# Altium PCB PCB2.PcbDoc (part 2 of 2)
Units mil, origin at the board's own origin, x right, y up, seen from the top; angles counter-clockwise.
Board outline 322 x 552 mil, 6 copper layers (Top Layer, Layer 2, Layer 3, Layer 4, Layer 5, Bottom Layer), stack 16.56 mil thick; 59 components, 50 nets, 249 pads, 145 vias.
Unrouted connection lines stored in the file: 1.
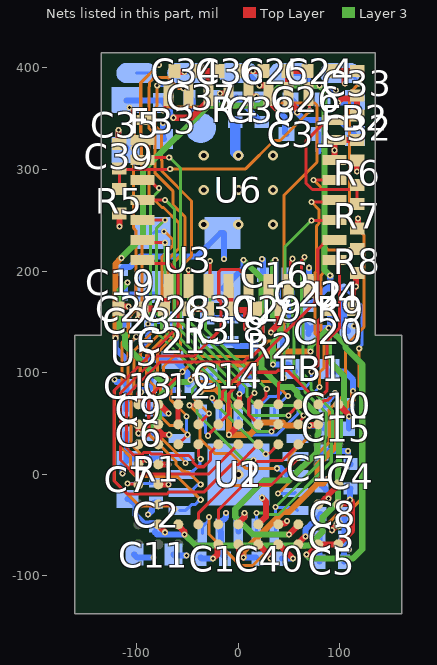
[diagram p6: the nets of this part, all layers, seen from the top]

## Part data
C1 C2 C3 C4 C5 C6 C9 C10 C12 C13 C16 C18 C24 C28 C30 C32 C36 C37 C40: library part CMP-cc290632c88a13ee-3, "0.1 µF ±10% 16V Ceramic Capacitor X7S 0201 (0603 Metric)", Capacitance="100 nF", Capacitance Tolerance=±10%, Case/Package=0201, Dielectric Characteristic=X7S, Voltage Rating (DC)="16.0 V", Lead-Free Status="Lead Free", Manufacturer Part Number=GRM033C71C104KE14D, Mounting Style="Surface Mount", OctopartID=cc290632c88a13ee, Octopart Url=http://octopart.com/grm033c71c104ke14d-murata-51454405, Packaging=Reel, RoHS=Compliant, Size-Length="600 µm", Size-Thickness="300 µm", Size-Width="300 µm"
C7 C11 C14 C20 C21: library part CMP-eacb22ede71a350c-8, "10 µF ±20% 10V Ceramic Capacitor X5R 0402 (1005 Metric)", Capacitance=10uF
C8 C15 C19 C25 C27 C29 C33 C34: library part CMP-19299660-4, "10000 pF ±10% 10V Ceramic Capacitor X7R 0201 (0603 Metric)", Capacitance=0.01uF, Case/Package=0201
C17 C26 C31: library part CMP-b7737c8c1b6d68b4-6, "4.7 µF Molded Tantalum Capacitors 10 V 0402 (1005 Metric) -", Capacitance=4.7µF, Voltage - Rated=10V, OctopartID=b7737c8c1b6d68b4, Octopart Url=http://octopart.com/f981a475mualzt-avx-49645944, Packaging="Tape & Reel (TR)"
C22 C23 C39: library part CMP-7dcab586fd61a20d-5, "1 µF ±20% 6.3V Ceramic Capacitor X5R 0201 (0603 Metric)", Capacitance="1.00 µF", Case/Package (SI)=0603, Dielectric Characteristic=X5R, OctopartID=7dcab586fd61a20d, Size-Length="600 µm"
C35: library part CMP-ed552659f9643292-2, "22 µF Molded Tantalum Capacitors 10 V 0603 (1608 Metric) 8Ohm @ 100kHz", Capacitance=22µF, Case/Package=0603, Voltage Rating=10Vdc, Manufacturer Part Number=F981A226MMALZT, Octopart Url=http://octopart.com/f981a226mmalzt-avx-33960279, Packaging=Reel
C38: library part CMP-131779-4, "0.047 µF ±10% 6.3V Ceramic Capacitor X5R 0201 (0603 Metric)", Capacitance=0.47uF, Capacitance Tolerance=±10%, Case/Package (SI)=0603, Dielectric Characteristic=X5R, Voltage Rating (DC)="6.3 V", RoHS=Compliant, Size-Length="0.0006 m", Size-Width="0.0003 m"
FB1: library part CMP-886590-4, "600 Ohms @ 100 MHz 1 - Ferrite Bead 0402 (1005 Metric) 500mA 340mOhm", Resistance="1000.0 Ω", Lead-Free Status="Lead Free", Number of Circuits=1, Octopart Url=https://octopart.com/blm15ax102sn1d-murata-17749155, OctopartID=6cdea4da9d1bb319, REACH SVHC Compliance="No SVHC", RoHS=Compliant, Size-Length="0.001 m", Size-Width="0.0005 m"
FB2 FB3: library part CMP-886590-4, "1 kOhms @ 100 MHz 1 - Ferrite Bead 0402 (1005 Metric) 350mA 490mOhm", Resistance="1000.0 Ω", Lead-Free Status="Lead Free", Number of Circuits=1, Octopart Url=https://octopart.com/blm15ax102sn1d-murata-17749155, OctopartID=6cdea4da9d1bb319, REACH SVHC Compliance="No SVHC", RoHS=Compliant, Size-Length="0.001 m", Size-Width="0.0005 m"
R1: library part CMP-1848656-4, "47 kOhms ±1% 0.05W, 1/20W Chip Resistor 0201 (0603 Metric) Automotive AEC-Q200 Thick Film", Case/Package=0201, Power Rating="0.05 W", Resistance=47kΩ, Resistance Tolerance=±1%, Voltage Rating (DC)="15.0 V", Lead-Free Status="Lead Free", Lifecycle Status="Not Listed by Manufacturer", Mounting Style="Surface Mount", Octopart Url=https://octopart.com/erj-1gef1822c-panasonic-39782564, OctopartID=543c9f6979fe8bfb, RoHS=Compliant, Size-Height="0.00023 m", Size-Width="0.0003 m"
R2: library part CMP-1848326-4, "1.5 kOhms ±0.1% 0.05W, 1/20W Chip Resistor 0201 (0603 Metric) - Thin Film", Resistance=1.5k, Resistance Tolerance=±5%, Size-Height="0.00023 m"
R3: library part CMP-1848326-4, "1.8 kOhms ±5% 0.05W, 1/20W Chip Resistor 0201 (0603 Metric) - Thick Film", Resistance=1.8k, Resistance Tolerance=±5%, Size-Height="0.00023 m"
R4: library part CMP-1848375-4, "49.9 Ohms ±0.1% 0.05W, 1/20W Chip Resistor 0201 (0603 Metric) Anti-Sulfur, Automotive AEC-Q200, Moisture Resistant Thin Film", Power Rating="0.05 W", Resistance=49.9Ω, Packaging="Cut Tape (CT)"
R5 R6: library part CMP-1848298-4, "10 kOhms ±1% 0.05W, 1/20W Chip Resistor 0201 (0603 Metric) Automotive AEC-Q200 Thick Film", Case/Package=0201, Power Rating="0.05 W", Resistance=10kΩ, Resistance Tolerance=±5%, Voltage Rating (DC)="25.0 V", Lead-Free Status="Lead Free", Lifecycle Status="Not Listed by Manufacturer", Mounting Style="Surface Mount", Octopart Url=https://octopart.com/erj-1gej103c-panasonic-39841918, RoHS=Compliant, Size-Height="0.00023 m", Size-Length="0.0006 m", Size-Width="0.0003 m"
R7: library part CMP-1848300-4, "100 kOhms ±1% 0.05W, 1/20W Chip Resistor 0201 (0603 Metric) Automotive AEC-Q200 Thick Film", Resistance=100kΩ, Lifecycle Status="Not Listed by Manufacturer", Octopart Url=https://octopart.com/erj-1gej104c-panasonic-55411467, Size-Height="0.00023 m", Size-Width="0.0003 m"
R8 R9: library part CMP-1848326-4, "3.3 kOhms ±1% 0.05W, 1/20W Chip Resistor 0201 (0603 Metric) Automotive AEC-Q200 Thick Film", Resistance=3.3k, Resistance Tolerance=±5%, Size-Height="0.00023 m"
U1: library part CMP-1cb5d12d1e47c372-8, "AVR series Microcontroller IC 8-Bit 16MHz 8KB (8K x 8) FLASH 20-VQFN (3x3)", Clock Speed="20.0 MHz", Manufacturer Part Number=ATTINY816-MFR, Octopart Url=http://octopart.com/attiny816-mfr-microchip-76687252, RAM Memory Size="512 B", RoHS=Compliant
U2: library part CMP-zuljd18wlr9in3443qu3-3, "image sensor from ONSemi"
U3: library part "ASD oscillator", "66.667 MHz XO (Standard) CMOS Oscillator 1.71V ~ 3.63V Standby (Power Down) 4-SMD, No Lead"
U4 U5: library part CMP-c6890ab21004194e-8, "Linear Voltage Regulator IC Positive Fixed 1 Output 250mA 4-WLCSP (0.64x0.64)"
U6: library part CMP-1f96d75fdae3c051-6, "1.4Gbps Serializer 12 Input 1 Output 32-WQFN (5x5)", Case/Package=WQFN, Number of Pins=32, Octopart Url=http://octopart.com/ds90ub913atrtvrq1-texas+instruments-29614099, Packaging=Reel, RoHS=Compliant
U7: library part CMP-05699-000060-1, "General Purpose Amplifier 1 Circuit Rail-to-Rail 4-WLP (0.84x0.84)", RoHS Compliant=Yes

## Free pads (board coordinates)
  oval 40x20 smd far side mask+1.97: 12(-100,395) 13(-50,395) 14(0,395) 15(50,395) 16(100,395)
  round 30 smd far side mask+1.97: 19(-37,341)
  round 5 on Bottom Overlay mask+1.97: ""(-119,106) ""(8.47,136.61) ""(81,192)

## Via types
v1: diameter 6, hole 3, Top Layer to Bottom Layer, tented both sides, 99 vias
v2: diameter 6, hole 3, Top Layer to Layer 4, tented both sides, 33 vias
v3: diameter 10, hole 5, Top Layer to Bottom Layer, tented both sides, 10 vias
v4: diameter 6, hole 3, Top Layer to Layer 4, 3 vias

## Nets (pads, with @x,y where several pads share a name; then routed paths per layer and width w, separated by ;. In a path a pad name is that pad's centre, name@x,y a point inside that pad or via, vN(x,y) a via of type N, cw(c..) or ccw(c..) an arc to the next point about the centre after c; other vN are vias at no path point)
AIN8: pad.12 U1.9 | length 479.7
  Layer 4 w3: v1(-78,403) -78.46,403 -96,385.46 -96,334 -88,326 -88,275.55 -75.11,262.66 -73.58,262.66 -58.5,247.58 -58.5,222.41 -69.09,211.82 -69.09,138.44 -90.5,117.03 -90.5,95 -82.5,87 -82.5,42.54 -55.4,15.43 -55.4,15.21 -52,11.81 v1(-52,11)
  Bottom Layer w3: pad.12@-100,395 -86.81,395 -78.81,403 v1(-78,403) ; U1.9@-56.1,17.72 -55.03,17.72 -52,14.69 v1(-52,11)
AIN9: pad.13 U1.10 | length 415.2
  Layer 4 w3: v1@-80,383 -80,362.61 -81.5,361.11 -81.5,342.89 -75.5,336.89 -75.5,308.89 -74.97,308.36 -74.97,298.06 -46,269.09 -46,214.82 -56.71,204.11 -56.71,123.08 -73.68,106.11 -73.68,99.89 -66.5,92.71 -66.5,73.5 v1@-51.02,58.02
  Bottom Layer w3: v1@-79.68,382.68 -72.32,382.68 -60,395 pad.13@-50,395 ; U1.10@-51.46,38 -51,38.46 v1(-51,57)
  other v1: -79.82,382.55
BOTPLATE: C17.1 C40.1 FB1.2 U2.H6 | length 297.4
  Top Layer w6: U2.H6@0,-68.9 0.74,-69.63 0.74,-77.74 v1(5,-82)
  Layer 4 w6: v1(5,-82) 5,-76.27 44.27,-37 50,-37 78,-9 ; v1(88.58,-4.24) 83.82,-9 78,-9 ; v1(113,82) 113,73.73 97,57.73 97,28.39 78,9.39 78,-9
  Bottom Layer w6: v1(5,-82) C40.1@17.25,-82 ; C17.1@82,-9.75 82,-10.73 C17.1@86,-14.73 ; FB1.2@88.85,101.45 104.56,101.45 113,93.01 v1(113,82)
CLK_EN: U1.7 U3.1 | length 327.4
  Layer 4 w3: -88,39.55 -61.4,12.95 -61.4,9.79 -55.11,3.5 -53.35,3.5 -52.19,2.34 -49.34,2.34 v1(-37,-10) ; -88,40 -88.5,40.5 -88.5,84.11 -92.89,88.5 -94.74,88.5 -96.5,90.26 -96.5,119.51 -75.09,140.92 -75.09,214.3 -64.5,224.89 -64.5,231.11 -72.39,239 v1(-73,239)
  Bottom Layer w3: U3.1@-83.45,237.57 -82.02,239 v1(-73,239) ; U1.7@-56.1,-17.72 -47.83,-17.72 -40.69,-10.57 -37.57,-10.57 v1(-37,-10)
CLK_IN: U2.G9 U3.3 | length 448.4
  Top Layer w3: U2.G9@59.06,-49.58 U2.G9@59.06,-49.21
  Top Layer w6: v1(50,-59) 59.06,-49.94 U2.G9@59.06,-49.58
  Layer 3 w6: v1(5,211) 23,193 23,104.27 41.27,86 52.73,86 58,80.73 58,78.3 79,57.3 79,40.29 78,39.29 78,22.27 49.73,-6 25.27,-6 -3,-34.27 -3,-41.73 14.27,-59 v1(50,-59)
  Bottom Layer w6: U3.3@-15.01,183 5,203.01 v1(5,211)
COAX: C37.1 pad.19 | length 23.7
  Bottom Layer w6: C37.1@-48.01,371 -45.1,368.09 -45.1,355.6 -40.29,350.79 pad.19@-40,350.79
DATA0: U2.B9 U6.19 | length 368.6
  Top Layer w3: U6.19@-94.49,309.53 -92.02,312 v2(-68,312) ; U2.B9@59.06,49.21 59.06,51.06 63.43,55.44 63.43,57.43 v2(64,58)
  Layer 3 w3: v2(-68,312) -67.7,312 -56.71,301.02 -56.71,150.26 8.5,85.05 8.5,76.89 17.66,67.73 54.27,67.73 v2(64,58)
DATA1: U2.C9 U6.20 | length 394.9
  Top Layer w3: U6.20@-94.49,289.84 -87.6,289.84 -80.33,282.57 -78.57,282.57 v2(-78,282) ; v2(15,14) 15.81,14 17.31,12.5 30.11,12.5 31.11,13.5 43.03,13.5 58.53,29 U2.C9@59,29
  Layer 3 w3: v2(-78,282) -78,279.03 -86.5,270.53 -86.5,156.11 -81.5,151.11 -81.5,141.11 -39.5,99.11 -39.5,89.6 -45,84.11 -45,77.89 -40.5,73.4 -40.5,59.89 5.39,14 v2(15,14)
DATA2: U2.A9 U6.21 | length 322
  Top Layer w3: U6.21@-94.49,270.16 v2(-72,270.16) ; v2(49.53,58.07) 49.53,58.72 59.06,68.25 U2.A9@59.06,68.9
  Layer 3 w3: v2(-72,270.16) -62.71,260.87 -62.71,147.78 -6.5,91.56 -6.5,76.07 11.5,58.07 v2(49.53,58.07)
DATA3: U2.C8 U6.22 | length 317.4
  Top Layer w3: U6.22@-94.49,250.47 v2(-72,250.47) ; v2(27,20) 27.57,20.57 30.42,20.57 U2.C8@39.37,29.53
  Layer 3 w3: v2(-72,250.47) -72.13,250.47 -80.5,242.11 -80.5,158.59 -75.5,153.59 -75.5,143.59 -18.5,86.59 -18.5,65.5 v2(27,20)
DATA4: U2.B8 U6.23 | length 270.9
  Top Layer w3: U6.23@-94.49,230.79 -91.7,228 v2(-72,228) ; v2(32.58,42) 32.58,42.21 39.37,49 U2.B8@39.37,49.21
  Layer 3 w3: v2(-72,228) -72,187.88 -69.5,185.38 -69.5,146.08 -12.5,89.08 -12.5,73.58 19.08,42 v2(32.58,42)
DATA5: U2.C7 U6.24 | length 439.2
  Top Layer w3: U6.24@-94.49,211.1 -91.07,207.68 -67.97,207.68 -59.48,199.19 -59.48,145.1 -122.5,82.08 -122.5,-6.11 -109.34,-19.26 -70.15,-19.26 -68.39,-17.5 -33.89,-17.5 -6.89,9.5 -0.34,9.5 U2.C7@19.68,29.53
DATA6: U2.B7 U6.26 | length 200.6
  Top Layer w3: U6.26@-49.21,185.51 v1(-49.21,201) ; v1(16,80) 10.26,74.26 10.26,58.63 U2.B7@19.68,49.21
  Layer 3 w3: v1(-49.21,201) -49.21,151.25 15.43,86.61 15.43,80.57 v1(16,80)
DATA7: U2.A7 U6.27 | length 197.2
  Top Layer w3: U6.27@-29.53,185.51 -28,187.04 v1(-28,210) ; U2.A7@19.68,68.9 27.43,76.64 27.43,83.43 v1(28,84)
  Layer 3 w3: v1(-28,210) -28,163.91 -32.22,159.69 -32.22,142.74 -3.14,113.65 -1.66,113.65 v1(28,84)
DATA8: U2.C6 U6.29 | length 422.7
  Top Layer w3: U2.C6@0,29.53 -29.11,0.42 -102.33,0.42 -116,14.09 -116,80.09 -79.59,116.5 -43.45,116.5 -17.22,142.74 -17.22,169.79 -19.26,171.84 -19.26,199.19 -16.63,201.82 0.42,201.82 9.84,192.4 U6.29@9.84,185.51
DATA9: U2.C5 U6.30 | length 382.2
  Top Layer w3: U2.C5@-19.68,29.53 -27.44,21.77 -27.44,13.95 -33.89,7.5 -40.11,7.5 -44.5,11.89 -44.5,14.11 -48.89,18.5 -74.07,18.5 -75.44,19.87 -85.26,19.87 -86.89,21.5 -93.11,21.5 -95.18,19.43 -95.48,19.43 -95.64,19.26 -103.26,19.26 -110,26 -110,77.61 -77.11,110.5 4.75,110.5 8.75,114.5 12.34,114.5 24.5,126.66 24.5,149.22 27.93,152.64 27.93,183.91 U6.30@29.53,185.51
FV: U1.12 U2.A5 U6.2 | length 245.9
  Top Layer w3: v1(-26,75) -25.89,75 -21.64,70.75 U2.A5@-19.68,70.75 ; U2.A5@-19.68,68.9 U2.A5@-19.68,70.75 ; U6.2@94.49,230.79 87.6,230.79 78.18,221.37 78.18,199.33 78.32,199.19 78.32,171.84 14.98,108.5 11.23,108.5 -15.42,81.85 -15.42,75.01 U2.A5@-19.68,70.75
  Bottom Layer w3: v1(-26,75) -25.43,74.43 -25.43,72.08 -17.72,64.37 U1.12@-17.72,56.1
GND: C1.1 C2.1 C3.1 C4.1 C5.1 C6.1 C7.2 C8.1 C9.1 C10.1 C11.2 C12.1 C13.1 C14.2 C15.1 C16.1 C17.2 C18.1 C19.1 C20.2 C21.2 C22.1 C23.1 C24.1 C25.1 C26.2 C27.1 C28.1 C29.1 C30.1 C31.2 C32.1 C33.1 C34.1 C35.2 C36.1 C39.1 C40.2 R1.1 R3.1 R4.2 R7.2 U1.3 U1.21 U2.A3 U2.A6 U2.A11 U2.B2 U2.B3 U2.C2 U2.D2 U2.E2 U2.E11 U2.F10 U2.G2 U2.G6 U2.G7 U2.G8 U2.G11 U2.H5 U2.H7 U2.H8 U3.2 U4.B2 U5.B2 U6.6 U6.7 U7.B1 | length 1219.9
  Top Layer w3: U2.A6@0,68.9 U2.A6@1,69.9
  Top Layer w5: U2.B2@-80,46 -80,45.27 -73.73,39 v2(-68,39) ; U2.C2@-78.74,30 U2.C2@-78.74,29.53 -77.81,30.45 -77.81,36.19 -76,38 ; U2.B3@-59.06,49.21 -59.5,49.66 -59.5,67.5 U2.A3@-59,68 ; U2.A3@-59.03,68.93 v1(-59,82) ; U2.A6@1,69.9 v1(1,79.18)
  Top Layer w6: C27.1@-118.11,163 -116.03,165.09 v1(-108.13,165.09) ; v1(-118,339) -118,326.01 C39.1@-117,325.01 ; U2.B2@-79.21,49.21 U2.B2@-78.74,49.21 ; U2.G2@-78.74,-49.21 -78.74,-50.23 v2(-71.97,-57) ; U2.E2@-78.74,-9.84 -78.58,-10 v2(-68.9,-10) ; U2.D2@-78.74,9.84 v2(-68.9,9.84) ; C34.1@-63.01,397 -63.01,395.91 -62.91,396 v2(-53,396) ; U2.B3@-59.06,48.94 U2.B3@-59,49 ; C28.1@-49.02,163 C30.1@-30.01,163 ; v1(-25,-83) -20.42,-78.42 -20.42,-69.42 U2.H5@-20,-69 ; U2.G6@0,-49.21 0,-48.17 6,-42.17 v1(6,-38) ; C36.1@4.43,397 C25.1@24.57,397 ; U2.H7@19.68,-68.9 31.5,-80.71 v1(31.5,-83) ; U2.G7@19.68,-49.21 19.68,-49.12 27.08,-41.73 27.08,-26.58 v1(23.5,-23) ; v1(32,139.57) 32,140.22 39.47,147.69 39.47,160.93 C29.1@41.54,163 ; U2.H8@39.37,-68.9 39.9,-68.9 v1(54,-83) ; U2.G8@39.37,-49.21 40.11,-48.48 45.52,-48.48 v1(48,-46) ; U2.F10@78.74,-29.53 79.78,-29.53 85.58,-23.73 v1(88.78,-23.73) 88.78,-19.88 U2.E11@98.66,-10 ; v1(92.06,-55) 97.85,-49.21 U2.G11@98.43,-49.21 ; C24.1@92.06,397 104.53,397 ; U6.6@94.49,309.53 U6.7@94.49,329.21 94.6,329.1 116.89,329.1 C32.1@117,328.99 ; U2.A11@98.43,68.9 109,58.32 v1(109,57) ; v2(105,384.78) 104.53,385.25 104.53,397 ; R7.2@117,241.99 117.7,242.69 v1(117.7,252) ; C33.1@117,397.01 104.53,397
  Bottom Layer w6: v1(-122,93.22) -119.87,91.09 -112.91,91.09 -110.01,88.18 C9.1@-110.01,64 ; v1(-118,339) -118,329 C35.2@-110,321 ; C19.1@-115.85,201.01 -112.94,203.91 -106.91,203.91 -96.45,214.37 -40.72,214.37 -17.52,237.57 -14.55,237.57 -14,237.02 v1(-14,212) ; v1(-114,1) -114,9.18 C7.2@-108.89,14.29 ; C6.1@-110.01,40 -110.01,15.41 C7.2@-108.89,14.29 ; C11.2@-102.38,-79 -99.38,-82 v1(-83.45,-82) ; U5.B2@-94.6,125.89 U5.B2@-95.11,125.89 -95.11,126.4 -89,132.51 C23.1@-89,144 ; C23.1@-89,147.01 v1(-89,148) ; v1(-88.82,-39.5) -85.09,-35.77 -85.09,-30.4 -82.18,-27.49 C2.1@-81,-27.49 ; C23.1@-86.99,151 -86.85,151.15 C21.2@-65.15,151.15 ; R1.1@-81,17.01 -82.36,15.65 -107.53,15.65 C7.2@-108.89,14.29 ; C12.1@-69,83.81 -68.1,82.91 -59.91,82.91 v1(-59,82) ; C1.1@-37.01,-82 -36.01,-83 v1(-25,-83) ; R3.1@-30.52,153.59 -30.22,153.89 -7.39,153.89 C18.1@-7.09,154.19 10.57,154.19 U7.B1@23.43,167.04 23.84,167.45 23.84,195.99 C16.1@24.25,196.4 24.25,211.25 v1(23.5,212) ; U1.3@0,-56.1 0,-47.83 6,-41.83 v1(6,-38) ; v1(1,79.18) 3.43,81.61 3.43,89.17 C14.2@11.26,97 ; C40.2@43.01,-83 v1(54,-83) ; C22.1@69.49,189.57 69.49,203.13 v1(69.68,203.32) ; 78.75,317.75 C31.2@78.75,335 ; C17.2@82,21.75 83.25,23 v1(108,23) 108,12.4 C4.1@110.4,10.01 ; C26.2@83.73,369 92.73,378 v1(96,378) ; U4.B2@103.89,170.11 104.25,169.75 104.25,144.75 C20.2@108,141 ; C5.1@104.01,-85.87 104.01,-73.99 ; C8.1@105.01,-39 104.51,-39.5 104.51,-61.6 C3.1@104.01,-62.1 104.01,-73.99 ; v1(109,-74) 104.02,-74 ; C15.1@109.01,45 v1(109,57) C10.1@109.01,68
  Bottom Layer w10: R4.2@-3,346.99 -3,317 v3(0,314)
  other v1: 114,146 -39.51,163
  other v2: 94.49,319 14.5,397
  other v3: 0,0 -34,246 0,246 34,246 -34,280 0,280 34,280 -34,314 34,314
GPIO0: U2.C3 U6.15 | length 447.6
  Top Layer w3: U2.C3@-59.06,29.53 -50,38.58 v2(-50,39) ; v4(-54,380) U6.15@-50,380
  Layer 4 w3: -76,123 -79.68,119.32 -79.68,97.41 -76.4,94.12 -76.4,56.89 -67.74,48.23 -59.23,48.23 v2(-50,39) ; -76,123.04 -63.09,135.95 -63.09,209.33 -52.5,219.92 -52.5,253.5 -64.5,265.5 -64.5,279.11 -81.39,296 -82,296 -82,334.91 -88,340.91 -88,381 -87.32,381.68 -87.32,385.66 -82.22,390.76 -69.76,390.76 -59,380 v4(-54,380)
GPIO1: U2.C1 U6.16 | length 619.3
  Top Layer w3: U2.C1@-98.43,29.53 -88.16,39.79 -88.16,75.84 -75.87,88.13 -67.87,88.13 v2(-55,101) ; v2@-74,359 -73.81,359 -72.32,360.49 -72.32,371.07 U6.16@-68.9,374.49
  Layer 4 w3: v2@-73,358 -69.25,361.75 18.36,361.75 22.11,365.5 75.24,365.5 77.5,363.24 77.5,307.3 45,274.8 45,139.9 36.25,131.14 28.98,131.14 14.34,116.5 10.5,116.5 10,116 -40,116 v2(-55,101)
  other v2: -74,358
GPIO2: U2.D1 U6.17 | length 397.5
  Top Layer w3: -104.8,357.99 -104.8,352.32 -103.48,351 U6.17@-100,351 ; U2.D1@-99.73,11.15 U2.D1@-98.43,9.84 -96.57,9.84 -92.99,13.43 -91.39,13.43 -90,14.81 v2@-90,15
  Layer 4 w3: v4(-107,361) -102,356 -102,330.61 -95.5,324.11 -95.5,243.26 -94.63,242.38 -94.63,165.63 -81.5,152.5 -81.5,143 -102.5,122 -102.5,85.11 -105.6,82 -105.6,29.6 v2(-90,14)
GPIO3: U2.F2 U6.18 | length 433.8
  Top Layer w3: v4(-103,321) -103,328 U6.18@-102,329 ; U2.F2@-78.74,-29.53 -67.47,-29.53 v2(-63,-34)
  Layer 4 w3: v4(-103,321) -103,242.27 -100.63,239.9 -100.63,161.98 -108.33,154.28 -108.33,136.07 -114.5,129.89 -114.5,90.11 -122,82.61 -122,-6.61 -97.61,-31 -66.81,-31 -63.81,-34 v2(-63,-34)
LV: U1.11 U2.B5 U6.1 | length 326.5
  Top Layer w3: v1(-30,38) -30,38.45 -19.68,48.76 U2.B5@-19.68,49.21 -9.42,59.48 -9.42,79.36 11.72,100.5 37.11,100.5 39.11,102.5 48.11,102.5 72.11,78.5 83.11,78.5 87.5,82.89 87.5,131.89 99.4,143.79 99.4,207.68 95.98,211.1 U6.1@94.49,211.1
  Bottom Layer w3: U1.11@-35.43,58.07 -32.41,55.04 -32.41,41.22 -30,38.81 v1(-30,38)
MISO: U1.16 U2.G4 | length 156
  Top Layer w3: U2.G4@-39.37,-49.21 -39.37,-38.37 v2(-12,-11)
  Layer 4 w3: v2(-12,-11) 31.61,-11 49.95,7.34 49.95,17.56 68.39,36 v1(69,36)
MOSI: U1.17 U2.G5 | length 114
  Top Layer w3: U2.G5@-19.68,-49.21 -19.68,-35.08 5.56,-9.84 33.16,-9.84 v1(59,16)
NetC18_2: C18.2 R2.1 R3.2 U7.A1 | length 78.8
  Bottom Layer w6: R3.2@-30.52,129.57 -30.22,129.87 -7.39,129.87 C18.2@-7.09,130.17 -5.91,130.17 -2.11,126.38 R2.1@20.15,126.38 22.69,128.93 22.69,150.56 U7.A1@23.43,151.3
NetC38_1: C38.1 U6.12 | length 9.5
  Top Layer w6: U6.12@9.84,374.49 9.84,373.92 11.76,372 v1(18,372)
NetC38_2: C38.2 R4.1 | length 33
  Bottom Layer w6: R4.1@-1.81,371 18.91,350.28 18.91,348.08 C38.2@20,346.99
NetC39_2: C39.2 R5.1 U6.9 | length 248.6
  Top Layer w3: R5.1@-117,281.01 C39.2@-117,300.99 -116.11,300.11 -68.45,300.11 -67.84,300.72 v2(-67.02,300.72) ; U6.9@68.9,374.49 70,373.39 v1(70,358)
  Layer 4 w3: v2(-67.02,300.72) 7.29,300.72 35.21,328.65 41.25,328.65 70,357.39 v1(70,358)
NetFB1_1: FB1.1 U7.B2 | length 179.6
  Layer 3 w6: v1(34,108) 34,128.84 41.28,136.13 41.28,147.78 34,155.06 34,208.64 v1(36.36,211)
  Bottom Layer w6: v1(34,108) 49.21,108 FB1.1@55.76,101.45 ; v1(36.36,211) 36.36,186.82 39.18,184.01 U7.B2@39.18,167.04
NetR1_2: R1.2 U2.E1 | length 39.7
  Top Layer w3: v1(-109,-9) -108.58,-9.42 -98.85,-9.42 U2.E1@-98.43,-9.84
  Bottom Layer w3: v1(-109,-9) -82.99,-9 R1.2@-81,-7.01
NetR6_1: R6.1 R7.1 U6.8 | length 151.8
  Top Layer w3: U6.8@94.49,348.9 87.6,348.9 66.5,327.8 66.5,286.74 72.81,280.42 108.16,280.42 108.33,280.59 112.59,280.59 R6.1@117,284.99 R7.1@117,266.01
PCLK: U2.A8 U6.3 | length 219.8
  Top Layer w3: U2.A8@39.37,68.9 39.37,89.37 v2(45,95) ; v2(72,250) 94.02,250 U6.3@94.49,250.47
  Layer 3 w3: v2(45,95) 45,122.03 48.78,125.81 48.78,152.02 45.74,155.06 45.74,223.74 v2(72,250)
RESET_EN: U1.8 U2.C4 | length 43.1
  Top Layer w3: U2.C4@-39.37,29.53 -39.37,18.18 -37,15.81 v1(-37,15)
  Bottom Layer w3: U1.8@-56.1,0 -47.83,0 -37.57,10.26 -37.57,14.76 v1@-37.33,15
RF: C37.2 U6.13 | length 5
  Top Layer w6: v1(-18,375) U6.13@-13,375
SCL: R9.1 U1.14 U6.4 | length 352.2
  Top Layer w3: v1(72,101) 78.58,107.58 78.58,151.41 88.99,161.82 R9.1@88.99,163 ; v2(72,268) 92.33,268 U6.4@94.49,270.16
  Layer 4 w3: v1(72,101) 78.5,107.5 78.5,135.41 75.5,138.41 75.5,198.54 77.18,200.22 77.18,244.57 79.5,246.89 79.5,260.5 v2(72,268)
  Bottom Layer w3: U1.14@17.72,56.1 17.72,64.37 29.85,76.5 37.89,76.5 45.89,84.5 64.86,84.5 72,91.64 72,100.65 v1@72.29,100.94 ; v1@72.63,100.81 v1@72.63,101.62
SDA: R8.1 U1.13 U6.5 | length 382.1
  Top Layer w3: v2(74,289.84) U6.5@94.49,289.84 ; v2(109.86,220.94) 115.94,220.94 R8.1@117,222.01
  Layer 4 w3: v2(74,289.84) 85.5,278.34 85.5,244.41 85,243.91 85,224 ; v1(80,86) 80,100.51 84.5,105.01 84.5,137.89 81.5,140.89 81.5,196.05 83.18,197.73 83.18,222.18 85,224 ; v2(109.86,220.94) 88.05,220.94 85,224
  Bottom Layer w3: U1.13@0,56.1 0,47.83 9.03,38.81 37.89,38.81 58.66,59.58 58.66,64.66 v1(80,86)
SPICLK: U1.15 U2.B4 | length 174
  Top Layer w3: U2.B4@-39.37,49.21 -39.37,49.42 -29,59.79 v2(-29,60)
  Layer 4 w3: v2(-29,60) -45,76 -45,84.11 -37.6,91.5 34.5,91.5 v1(49,77)
  Bottom Layer w3: U1.15@35.43,58.07 35.43,64.37 47.49,76.43 48.43,76.43 v1(49,77)
SS_N: U1.18 U2.A4 | length 148.9
  Top Layer w3: v1(-48,68) -47.55,68.45 -39.82,68.45 U2.A4@-39.37,68.9
  Layer 4 w3: v1(-48,68) -37.5,57.5 -37.5,34.89 -23.3,20.7 -7.26,20.7 7.43,6 v1(38,6)
  Bottom Layer w6: v1(38,6) 41.83,6 48.58,-0.74 U1.18@50.21,-0.74
TXD/RXD: U1.1 U1.20 U6.31 | length 356.6
  Top Layer w3: U6.31@49.21,185.51 51.5,187.8 51.5,209.69 53.24,211.43 v1(53.24,212.24)
  Layer 3 w3: v1(36.51,-32.03) 36.57,-32.03 85.5,16.89 85.5,36.18 86.5,37.18 86.5,60.41 65.5,81.41 65.5,88.41 54.78,99.13 54.78,154.51 53.24,156.05 v1(53.24,212.24)
  Bottom Layer w3: U1.1@35.43,-58.07 36.51,-56.99 v1(36.51,-32.03) 36.88,-32.41 55.04,-32.41 U1.20@58.07,-35.43
UPDI: pad.16 U1.19 | length 489.9
  Layer 4 w3: v1(39,-19) 89.5,31.5 89.5,63.89 105.5,79.89 105.5,126.89 123.5,144.89 123.5,235.59 109.39,249.7 109.39,375.39 v1(119,385)
  Bottom Layer w3: v1(39,-19) 54.82,-19 U1.19@56.1,-17.72 ; pad.16@100,395 109.5,395 119,385.5 v1(119,385)
V1P8: C1.2 C8.2 C9.2 C10.2 C11.1 C27.2 C28.2 C29.2 C30.2 C31.1 C32.2 C33.2 FB2.2 FB3.2 pad.14 R5.2 R6.2 R8.2 R9.2 U1.4 U2.A2 U2.A10 U2.H9 U6.11 U6.25 U6.28 | length 512.2
  Top Layer w3: U2.A10@78.74,68.9 80.59,68.9 84.19,72.5 87.5,72.5 v1(95,80)
  Top Layer w6: v1(-117,244) R5.2@-117,256.99 ; v1(-99,153) -97,155 -97,160.09 C27.2@-94.1,163 C28.2@-73.03,163 -70.82,165.21 -70.82,183.59 U6.25@-68.9,185.51 ; U2.A2@-78.74,68.9 -77.8,68.9 v1(-68.9,60) ; U6.28@-9.84,185.51 -7.92,183.59 -7.92,164.93 C30.2@-5.83,162.84 ; C30.2@-5.99,163 -4.86,161.87 7.5,161.87 ; v1(9.03,142.32) 7.5,143.85 7.5,161.87 ; C29.2@17.52,163 16.39,161.87 7.5,161.87 ; v1(21,383) 27.61,383 29.53,381.08 29.53,367.6 39,358.13 v1(39,358) ; U2.H9@59.06,-68.9 59.06,-67.94 v1(66,-61) ; v1(98,366) 102.09,370.09 114.09,370.09 C33.2@117,372.99 C32.2@117,353.01 ; R9.2@113.01,163 113.01,182.01 v1(116,185) 116,196.99 R8.2@117,197.99 ; v1(116.89,298) 116.89,308.9 R6.2@117,309.01
  Bottom Layer w6: C9.2@-85.99,64 -85.99,62.91 -83.09,60 v1(-68.9,60) ; v1(-74,346) -74,331.28 FB3.2@-73,330.28 ; C11.1@-63.8,-79 -62.8,-80 v1(-51,-80) ; C1.2@-12.99,-82 -12.99,-81.82 -16.91,-77.9 -16.91,-56.9 U1.4@-17.72,-56.1 -17.72,-47.83 -12,-42.12 v1(-12,-38) ; pad.14@10,394 v1(21,383) ; v1(39,358) 46.11,350.89 46.11,336.14 C31.1@47.25,335 ; v1(66,-61) 66,-54.62 71.6,-49.01 72.16,-49.01 80.99,-40.18 C8.2@80.99,-39 ; C10.2@84.99,68 84.99,69.18 95,79.19 v1(95,80) ; v1(98,366) 112.28,366 FB2.2@115,368.72
V3P3: C22.2 C23.2 pad.15 U4.A1 U5.A1 | length 699.9
  Layer 3 w6: v1(-115,213) -94,234 -94,298.73 -29.73,363 21.73,363 41.28,382.55 v1(79.82,382.55) 84.91,377.46 84.91,201.09 90.11,195.89 v1(90.45,195.89)
  Layer 4 w6: v1(-121,134) -121,207 v1(-115,213)
  Bottom Layer w6: C23.2@-111.01,151 -111.01,149.82 -121,139.83 -121,123.95 -109.16,112.11 U5.A1@-108.89,112.11 ; pad.15@50,395 61.98,395 74.42,382.55 v1(79.82,382.55) ; C22.2@69.49,165.56 70.67,165.56 73.57,168.46 73.57,169.65 87.46,183.53 89.75,183.53 U4.A1@90.11,183.89 ; U4.A1@90,184 90.45,184.45 v1(90.45,195.89)
V3P3_EN: U1.5 U4.B1 | length 443.6
  Layer 4 w3: v1(-29,-42) -29,-58.61 1.89,-89.5 14.39,-89.5 32.39,-71.5 66.11,-71.5 81.19,-56.42 81.19,-55.27 96.27,-40.19 105.42,-40.19 120.5,-25.11 120.5,85.11 119,86.61 v1(119,124)
  Bottom Layer w3: U1.5@-35.43,-58.07 -35.43,-51.77 -29.57,-45.91 -29.57,-42.57 v1(-29,-42) ; U4.B1@103,183 104.78,183 121.65,166.13 121.65,127.46 119,124.81 v1(119,124)
V3P3_IN: C2.2 C3.2 C4.2 C5.2 C6.2 C7.1 C16.2 C19.2 C20.1 R2.2 U2.B1 U2.F11 U2.G3 U2.H10 U2.H11 U3.4 U4.A2 U7.A2 | length 1489.3
  Top Layer w6: U2.B1@-98.43,49.21 -98.1,48.89 v1(-98.1,40.46) ; U2.G3@-59.06,-49.21 -59.06,-50.25 -53,-56.31 v1(-53,-59) ; v1(67,-79) 68.64,-79 U2.H10@78.74,-68.9 U2.H11@98.43,-68.9 ; U2.F11@98.43,-29.53 99.16,-28.79 106.21,-28.79 v1(110,-25) 112,-27 112,-55.32 U2.H11@99.68,-67.64 ; U2.H11@99.68,-67.68 U2.H11@100,-68
  Layer 3 w6: v1(-109,189) -117.13,180.87 -117.13,142.85 -111.69,137.42 -111.69,127.4 -75.04,90.75 -62.98,90.75 ; v1@-98.05,40.51 -92.49,40.51 -77.9,55.1 -77.9,75.83 -62.99,90.73 ; -62.68,90.75 -62.98,90.75 ; -62.38,90.73 -62.99,90.73 ; v1(-53,-59) -42,-70 69.73,-70 83.06,-56.67 83.06,-42.17 98,-27.24 98,8.24 99,9.24 99,30.58 100,31.58 100,60.73 104,64.73 104,96.86 89,111.86 v1(89,144) ; v2(-47,93) -49,91 -62.73,91 -62.98,90.75 ; v1(67,-79) 71,-83 112.73,-83 122,-73.73 122,108.27 105.5,124.77 105.5,127.5 v1(89,144) ; v1(71,121) 71,126 v1(89,144)
  Layer 4 w6: v2(-47,93) -32,108 16.45,108 29.45,121 v1(71,121)
  Bottom Layer w6: C19.2@-114.67,176.99 -111.76,179.9 -111.76,186.24 v1(-109,189) ; C19.2@-111.76,176.99 U3.4@-81.88,176.99 ; C7.1@-108.89,-24.29 -106.92,-24.29 -101.06,-30.15 -101.06,-39.98 -92.44,-48.6 -83.91,-48.6 C2.2@-81,-51.51 ; v1(-98.1,40.46) -97.65,40 C6.2@-85.99,40 ; C2.2@-82,-57.01 -80.01,-59 v1(-53,-59) ; R2.2@44.16,126.38 44.16,145.27 39.18,150.26 U7.A2@39.18,151.3 44.1,151.3 ; C16.2@48.26,196.4 51.17,193.49 51.17,181.02 52.24,179.95 52.24,159.43 44.1,151.3 ; v1(67,-79) 69.79,-81.79 77.09,-81.79 79.99,-84.69 C5.2@79.99,-85.87 ; C20.1@69,138.32 C20.1@69,140 ; C5.2@79.99,-81.79 C3.2@79.99,-62.36 ; U4.A2@90.11,169.24 90.11,145.11 v1(89,144) 72.71,144 C20.1@69.71,141 69.71,142.97 63.85,148.83 61.88,148.83 59.41,151.3 44.1,151.3 ; v1(110,-25) 110,-14.4 C4.2@110.4,-14.01
VDDCML: C34.2 C35.1 C36.2 FB3.1 U6.14 | length 153
  Top Layer w6: v1(-64,351) -46.13,351 -29.53,367.6 U6.14@-29.53,374.49 -29.29,374.73 -29.29,397 ; C34.2@-38.99,397 -29.29,397 ; C36.2@-19.58,397 -29.29,397
  Bottom Layer w6: C35.1@-110,368 -75.28,368 FB3.1@-73,365.72 ; FB3.1@-73,366 FB3.1@-67,372 ; FB3.1@-72,364 -67.16,359.16 -67.16,354.16 v1(-64,351)
VDDPLL: C24.2 C25.2 C26.1 FB2.1 U6.10 | length 145
  Top Layer w6: v1(58,356) 58,358.81 49.21,367.6 U6.10@49.21,374.49 48.9,374.8 48.9,396.69 C25.2@48.59,397 C24.2@68.04,397
  Bottom Layer w6: C26.1@52.24,369 56.13,365.11 56.13,357.87 65.39,348.61 99.67,348.61 114,334.28 FB2.1@114,334
VPIX_EN: U1.6 U5.B1 | length 262
  Layer 4 w3: -108.5,126.5 -108.5,87.63 -116,80.13 -116,27 -105.89,16.89 -105.89,2.89 -101,-2 -60,-2 v1(-37,-25) ; -108.5,126.55 -106.4,128.66 -106.4,129.51 v1@-100.47,135.44
  Bottom Layer w3: U5.B1@-108.89,125.89 -108.89,126.46 -100.47,134.88 v1(-100.47,135.46) ; U1.6@-58.07,-35.43 -51.77,-35.43 -46.15,-29.82 -42.63,-29.82 -37.81,-25 v1(-37,-25)
VPIX_IN: C12.2 C13.2 C14.1 C15.2 C21.1 U2.A1 U2.B6 U2.B10 U5.A2 | length 334.4
  Top Layer w6: U2.A1@-98.43,68.9 -97.69,69.63 -97.69,79.31 v1(-96,81) ; v1(-9,39) -9,39.17 0,48.17 U2.B6@0,49.21 ; v1(70,48) 70.48,48.48 78.48,48.48 U2.B10@79,49
  Layer 4 w6: v1(-37.5,81) -34.5,84 -22.27,84 -9,70.73 v1(-9,39) 11.43,39 23.43,51 43.87,51 46.87,48 v1(70,48)
  Bottom Layer w6: v1(-96,81) -94.09,82.91 -88.9,82.91 -85.99,85.82 C13.2@-85.99,87 ; C13.2@-86.59,87.6 -86.59,103.09 -95.11,111.6 U5.A2@-95.11,112.11 -94.81,112.41 -62.73,112.41 -49.9,99.57 -49.9,89.72 C12.2@-48.9,88.72 ; C12.2@-43.09,82.09 -42,81 v1(-37.5,81) -35.15,83.35 -35.15,89.17 C14.1@-27.32,97 ; v1(70,48) 82.09,48 84.99,45.09 C15.2@84.99,45
XCK: U1.2 U6.32 | length 362.1
  Top Layer w3: v2(65,214) 65,213.19 62.18,210.37 62.18,199.12 67,194.3 U6.32@67,184.61
  Layer 3 w3: v1(18.08,-38) 28.49,-38 30.02,-39.53 39.62,-39.53 91.5,12.35 91.5,33.7 92.5,34.7 92.5,62.89 71.5,83.89 71.5,90.89 63.5,98.89 63.5,153.79 62.18,155.11 62.18,206.43 64.43,208.67 64.43,213.43 v2(65,214)
  Bottom Layer w3: U1.2@17.72,-56.1 18.08,-55.74 v1(18.08,-38)
pads on no net: U2.B11 U2.C10 U2.C11 U2.D10 U2.D11 U2.E10 U2.F1 U2.G1 U2.G10 U2.H1 U2.H2 U2.H3 U2.H4

## Polygon pours and split planes (outlines as drawn)
GND on Bottom Layer "GND" (solid, pour order 26): -94,320 125,320 125,200 75,200 75,218 12,218 12,262 -94,262
no net on Bottom Solder (solid): -94,320 125,320 125,200 75,200 75,218 12,218 12,262 -94,262
GND on Layer 2 "Layer 1-GND" (solid, pour order 0): -125,405 125,405 125,-95 -125,-95
V1P8 on Layer 5 "Layer 2-V1P8" (solid, pour order 10): -125,405 125,405 125,-95 -125,-95

## Silkscreen, mask and mechanical layers (free items; w line width, h text height)
Top Overlay:
  rectangle: 82.2,178.85 102.2,198.85
Bottom Overlay:
  text "J.Scherrer" at 145.95,113.69 h20 r90
  text "version 2.1" at -147.06,-78.73 h20 r270
  text "Fee Lab @MIT" at 144.72,-125.32 h25
Top Paste:
  region: -82.68,343.98 -82.68,353.82 -106.3,353.82 -106.3,343.98
  region: -82.68,324.29 -82.68,334.13 -106.3,334.13 -106.3,324.29
  region: -82.68,304.61 -82.68,314.45 -106.3,314.45 -106.3,304.61
  region: -82.68,284.92 -82.68,294.76 -106.3,294.76 -106.3,284.92
  region: -82.68,265.24 -82.68,275.08 -106.3,275.08 -106.3,265.24
  region: -82.68,245.55 -82.68,255.39 -106.3,255.39 -106.3,245.55
  region: -82.68,225.87 -82.68,235.71 -106.3,235.71 -106.3,225.87
  region: -82.68,206.18 -82.68,216.02 -106.3,216.02 -106.3,206.18
  region: 106.3,343.98 106.3,353.82 82.68,353.82 82.68,343.98
  region: 106.3,324.29 106.3,334.13 82.68,334.13 82.68,324.29
  region: 106.3,304.61 106.3,314.45 82.68,314.45 82.68,304.61
  region: 106.3,284.92 106.3,294.76 82.68,294.76 82.68,284.92
  region: 106.3,265.24 106.3,275.08 82.68,275.08 82.68,265.24
  region: 106.3,245.55 106.3,255.39 82.68,255.39 82.68,245.55
  region: 106.3,225.87 106.3,235.71 82.68,235.71 82.68,225.87
  region: 106.3,206.18 106.3,216.02 82.68,216.02 82.68,206.18
  rectangle: -73.82,173.7 -63.98,197.32
  rectangle: -54.13,173.7 -44.29,197.32
  rectangle: -34.45,173.7 -24.61,197.32
  rectangle: -14.76,173.7 -4.92,197.32
  rectangle: 4.92,173.7 14.76,197.32
  rectangle: 24.61,173.7 34.45,197.32
  rectangle: 44.29,173.7 54.13,197.32
  rectangle: 63.98,173.7 73.82,197.32
  rectangle: -73.82,362.68 -63.98,386.3
  rectangle: -54.13,362.68 -44.29,386.3
  rectangle: -34.45,362.68 -24.61,386.3
  rectangle: -14.76,362.68 -4.92,386.3
  rectangle: 4.92,362.68 14.76,386.3
  rectangle: 24.61,362.68 34.45,386.3
  rectangle: 44.29,362.68 54.13,386.3
  rectangle: 63.98,362.68 73.82,386.3
  region: 59,221 59,339.05 -59.05,339.05 -59.05,221
Top Solder:
  region: 62.99,217.01 62.99,342.99 -62.99,342.99 -62.99,217.01
Bottom Solder:
  pour cut-out: 110,291 124,291 124,304 110,304
Assembly Top:
  lines w3.94: -98.43,181.57 -98.43,378.43 98.43,378.43 98.43,181.57 -98.43,181.57
Assembly Bottom:
  lines w4: -127.73,312.5 -127.73,375.5 -94.27,375.5 -94.27,312.5 -127.73,312.5
Dimensions Top:
  the board outline again, w10
Courtyard Top:
  lines w3.94: -98.43,181.57 98.43,181.57 98.43,378.43 -98.43,378.43 -98.43,181.57